# Allegro board Desulfator.brd
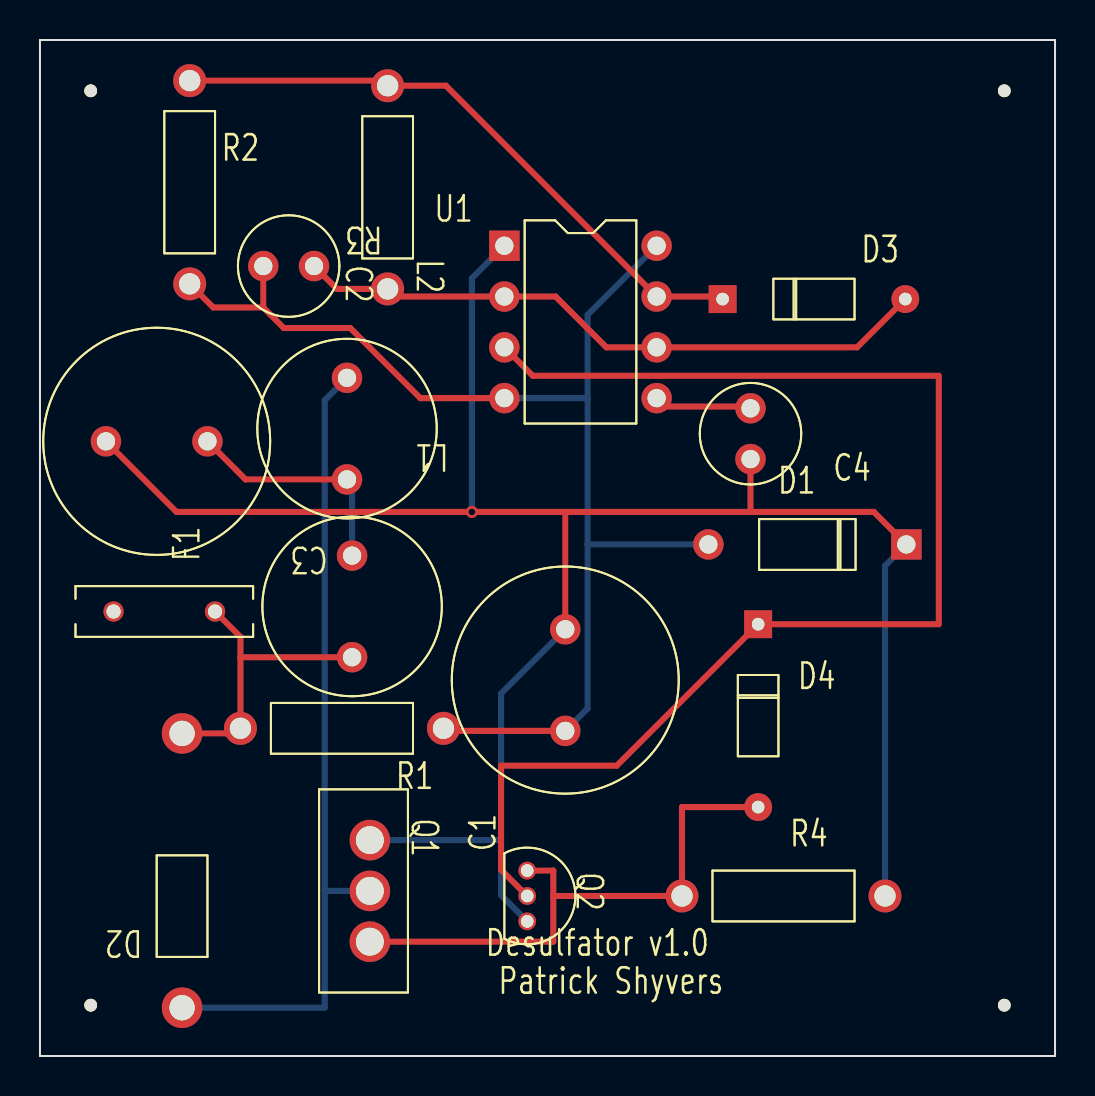
[diagram p0: board, top side]
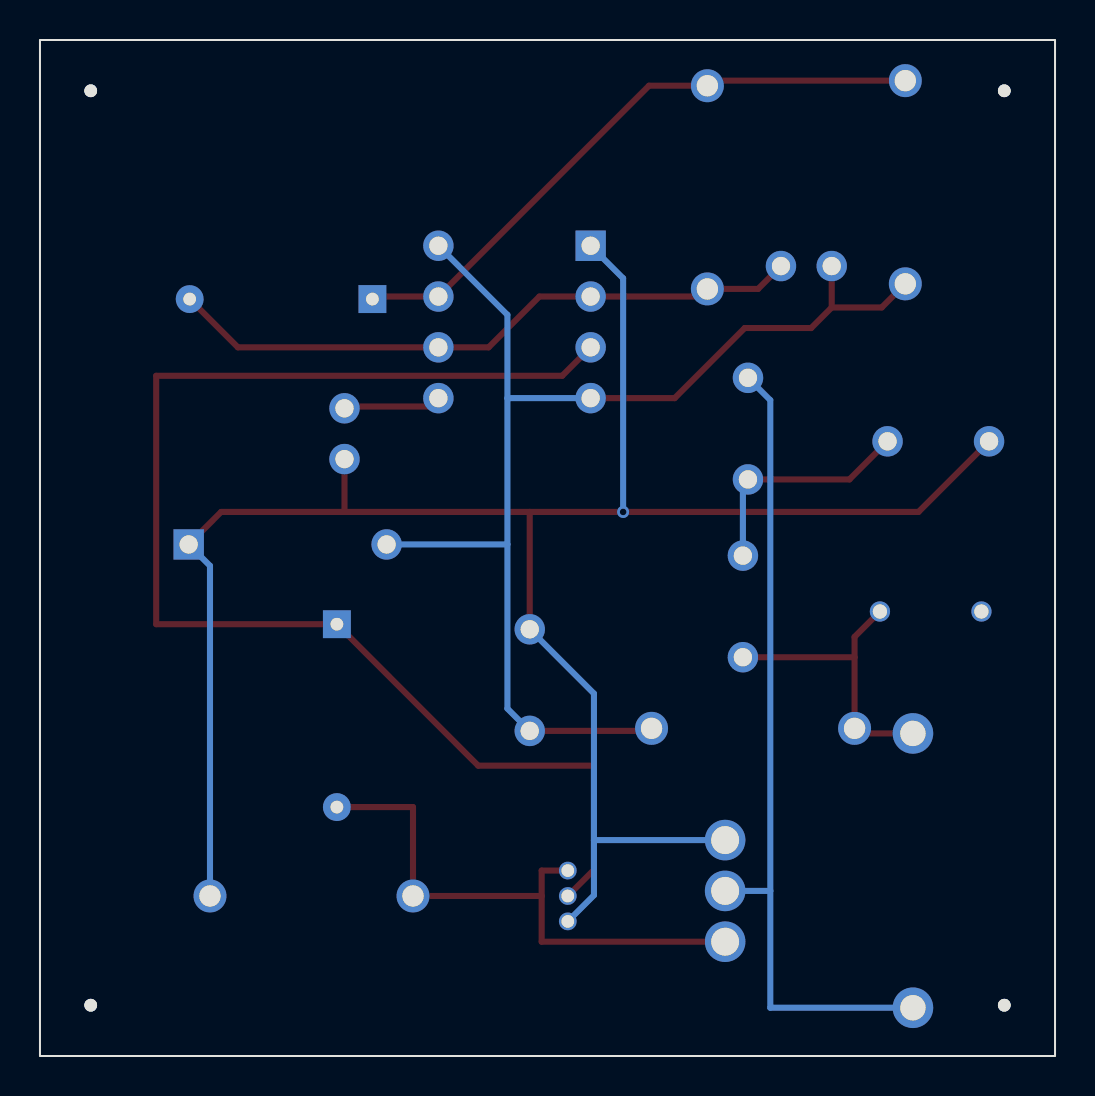
[diagram p1: board, bottom side, seen from below]

Outline 50.8 x 50.8 mm; copper layers: TOP, BOTTOM. Coordinates in mm from the lower left corner of the outline.
Outline path: rectangle 0,0 50.8,50.8 ; 0,49.53 0,39.37 ; 0,50.8 0,0 50.8,0 50.8,50.8 0,50.8

## Placement (name value [footprint] x y rotation side)
C1  100uF  [ELECTROLYTIC400]  26.29 16.26 90 top
C2  .0047uF  [CAP196]  11.18 39.5 270 top
C3  100uF  [ELECTROLYTIC400]  8.38 30.73 180 top
C4  0.01uF  [CAP196]  35.56 32.38 180 top
D1  1N4744  [DO41]  43.36 25.58 90 top
D2  FR602  [R6]  7.11 2.41 0 top
D3  1N4148  [DO35]  34.16 37.85 270 top
D4  1N4148  [DO35]  35.94 21.59 180 top
F1  2A  [FUSE200]  10.03 22.23 180 top
L1  1000uH  [IND335]  15.62 25.02 270 top
L2  220uH  [IND335]  15.37 33.91 270 top
NOREF  -  [unnamed]  2.54 48.26 180 bottom
NOREF#2  -  [unnamed]  48.26 48.26 180 bottom
NOREF#3  -  [unnamed]  2.54 2.54 180 bottom
NOREF#4  -  [unnamed]  48.26 2.54 180 bottom
Q1  IRFZ44N/TO  [TO220AB]  16.51 5.71 270 top
Q2  2N2907  [TO92]  24.38 9.27 0 top
R1  100  [RES400]  20.19 16.38 90 top
R2  15k  [RES400]  7.49 38.61 0 top
R3  270k  [RES400]  17.4 48.51 180 top
R4  15k  [RES400]  32.13 8 270 top
U1  NE555/SO  [DIP8_3]  23.24 40.51 0 top

## Library data of the parts
C1-C4 = C: Tolerance: ***; User Part Number: ***
D1 = DIODE ZENER
D2-D4 = DIODE
F1 = FUSE: Tolerance: ***; User Part Number: ***
L1 L2 = INDUCTOR IRON: Tolerance: ***; User Part Number: ***
Q1 = IRFZ44N/TO
Q2 = 2N2907
R1-R4 = R: Tolerance: ***; User Part Number: ***
U1 = NE555/SO_0: Tolerance: ***; User Part Number: ***

## Footprints (pads in the part's own frame, mm; a bottom-side part is the same pattern mirrored in y, then rotated)
CAP196
  round 1.524 hole 0.914: 1(0,0) 2(0,2.54)
DIP8_3
  rect 1.524x1.524 hole 0.914: 1(0,0)
  round 1.524 hole 0.914: 2(0,-2.54) 3(0,-5.08) 4(0,-7.62) 5(7.62,-7.62) 6(7.62,-5.08) 7(7.62,-2.54) 8(7.62,0)
DO35
  rect 1.397x1.397 hole 0.635: 1(0,0)
  round 1.397 hole 0.635: 2(0,9.144)
DO41
  rect 1.524x1.524 hole 0.914: 1(0,0)
  round 1.524 hole 0.914: 2(0,9.906)
ELECTROLYTIC400
  round 1.524 hole 0.914: 1(0,0) 2(5.08,0)
FUSE200
  round 1.016 hole 0.711: 1(1.27,0) 2(6.35,0)
IND335
  round 1.524 hole 0.914: 1(0,0) 2(5.08,0)
R6
  round 2.032 hole 1.27: 1(0,0) 2(0,13.716)
RES400
  round 1.651 hole 1.067: 1(0,0) 2(0,10.16)
TO92
  round 0.889 hole 0.635: 1(0,0) 2(0,-1.27) 3(0,-2.54)
TO220AB
  round 2.032 hole 1.397: 1(0,0) 2(-2.54,0) 3(-5.08,0)
unnamed
  round 0.635 hole 3.175 unplated: (0,0)

## Nets
GND: C1.2 C3.2 C4.2 D1.1(ANODE) Q1.3(S) Q2.3(COLLECTOR) R4.2 U1.1
BATTERY +: F1.2
N22909: C1.1 C2.1 D1.2(CATHODE) R1.1 R2.1 U1.4(RST) U1.8(VCC)
N22953: C2.2 D3.2(K) R3.2 U1.2(TRG) U1.6(THR)
N22993: D3.1(A) R2.2 R3.1 U1.7(DSCHG)
N23058: C4.1 U1.5(CV)
N23106: D2.2(K) F1.1 L1.2 R1.2
N23110: C3.1 L1.1 L2.2
N23204: D4.2(K) Q1.1(G) Q2.1(EMITTER) R4.1
N23235: D4.1(A) Q2.2(BASE) U1.3(OUT)
N23691: D2.1(A) L2.1 Q1.2(D)

## Via types
v1: diameter 0.61, hole 0.33, TOP to BOTTOM, 1 via

## Routing (per net, layer and track width the routed paths; a pad name or vN(x,y) marks a point on that pad's centre or on a via; arc(x,y) is an arc through that point)
GND: length 105.7
  TOP w0.305: 26.29,27.2 v1(21.62,27.2) 6.83,27.2 C3.2 ; 26.29,27.2 C1.2 ; 26.29,27.2 35.56,27.2 ; C4.2 35.56,27.2 ; 35.56,27.2 41.73,27.2 D1.1
  BOTTOM w0.305: 23.08,10.8 23.08,8.04 Q2.3 ; 23.08,10.8 Q1.3 ; 23.08,10.8 23.08,18.12 C1.2 ; R4.2 42.29,24.51 D1.1 ; v1(21.62,27.2) 21.62,38.89 U1.1
N22909: length 62.7
  TOP w0.305: R2.1 8.67,37.43 11.18,37.43 ; 11.18,37.43 12.2,36.4 15.53,36.4 19.03,32.89 U1.4 ; 11.18,37.43 C2.1 ; C1.1 20.32,16.26 R1.1
  BOTTOM w0.305: D1.2 27.41,25.58 ; 27.41,25.58 27.41,17.37 C1.1 ; 27.41,25.58 27.41,32.89 ; U1.8 27.41,37.06 27.41,32.89 ; 27.41,32.89 U1.4
N22953: length 32.3
  TOP w0.305: C2.2 14.86,38.35 R3.2 17.78,37.97 U1.2 25.81,37.97 28.35,35.43 U1.6 40.89,35.43 D3.2
N22993: length 31.2
  TOP w0.305: D3.1 34.04,37.97 U1.7 20.32,48.51 R3.1 17.14,48.77 R2.2
N23058: length 4.9
  TOP w0.305: C4.1 35.47,32.47 31.28,32.47 U1.5
N23106: length 15
  TOP w0.305: 10.03,19.94 L1.2 ; 10.03,19.94 10.03,20.95 F1.1 ; 10.03,19.94 R1.2 9.78,16.13 D2.2
N23110: length 11.7
  TOP w0.305: C3.1 10.29,28.83 L2.2
  BOTTOM w0.305: L1.1 15.62,28.57 L2.2
N23204: length 28.7
  TOP w0.305: Q1.1 25.69,5.71 25.69,8 ; 25.69,8 R4.1 32.13,12.45 D4.2 ; 25.69,8 25.69,9.27 Q2.1
N23235: length 66.6
  TOP w0.305: Q2.2 23.08,9.31 23.08,14.52 28.87,14.52 D4.1 44.98,21.59 44.98,34.01 24.66,34.01 U1.3
N23691: length 41.4
  BOTTOM w0.305: D2.1 14.25,2.41 14.25,8.25 ; 14.25,8.25 Q1.2 ; 14.25,8.25 14.25,32.79 L2.1

## Text on the board
BOTTOM: BOTTOM
Board Geometry/Soldermask Bottom: SMB
Ref Des/Silkscreen Bottom: SSB
TOP: TOP
Board Geometry/Soldermask Top: SMT
Ref Des/Silkscreen Top: SST | Desulfator v1.0 | Patrick Shyvers
DEVICE_TYPE_TOP: FIGURE | SIZE | 60.0 | 52.0 | 42.0 | 38.0 | 35.0 | 28.0 | 20.0 | 125.0 | DRILL CHART: TOP to BOTTOM | ALL UNITS ARE IN MILS | PLATED | NON-PLATED | QTY | 5 | 2 | 8 | 22 | 3 | 4
User.6: MECH
